# Altium PCB Bedside Lamp V2.0.PcbDoc
Units mm, origin at the board's own origin, x right, y up, seen from the top; angles counter-clockwise.
Board outline 95.4 x 120.8 mm, 2 copper layers (Top Layer, Bottom Layer); 71 components, 52 nets, 282 pads, 79 vias.
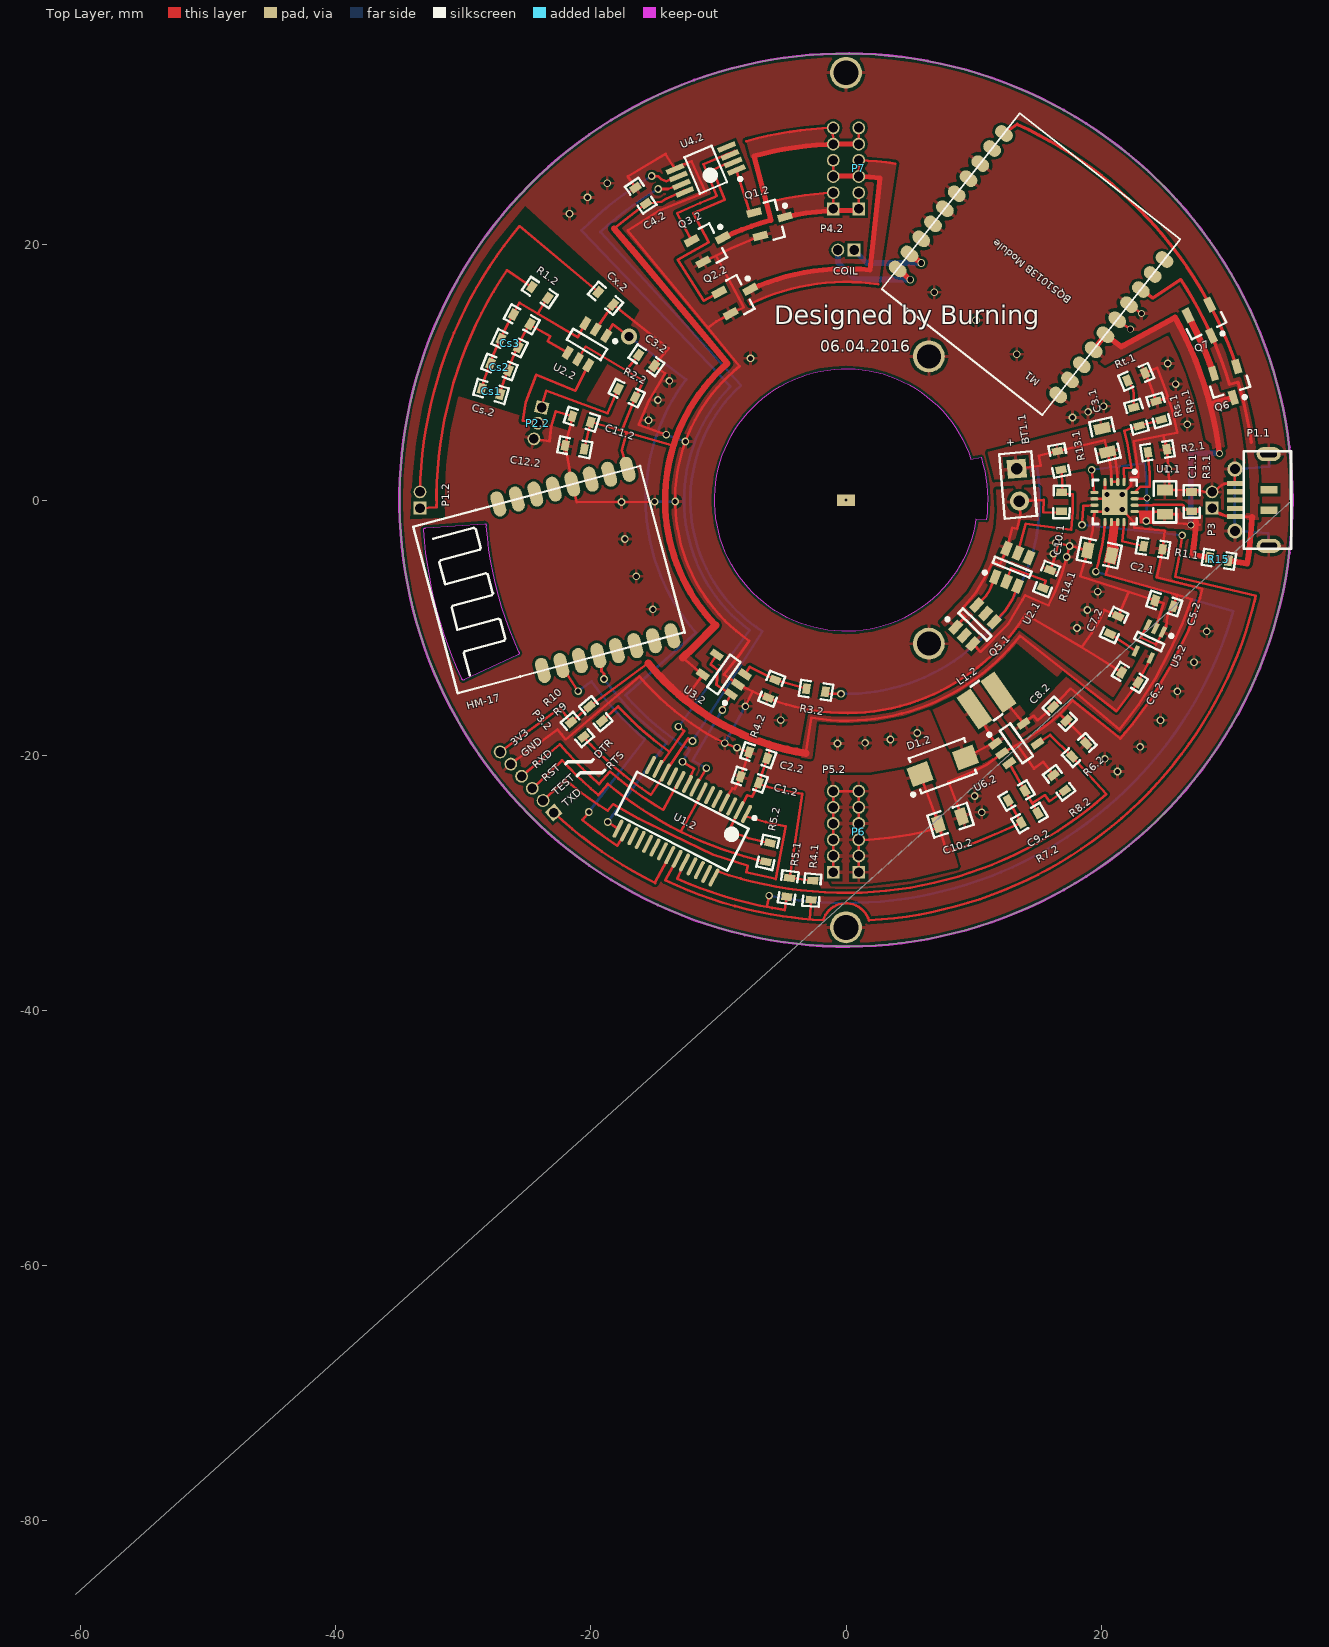
[diagram p0: Top Layer view]
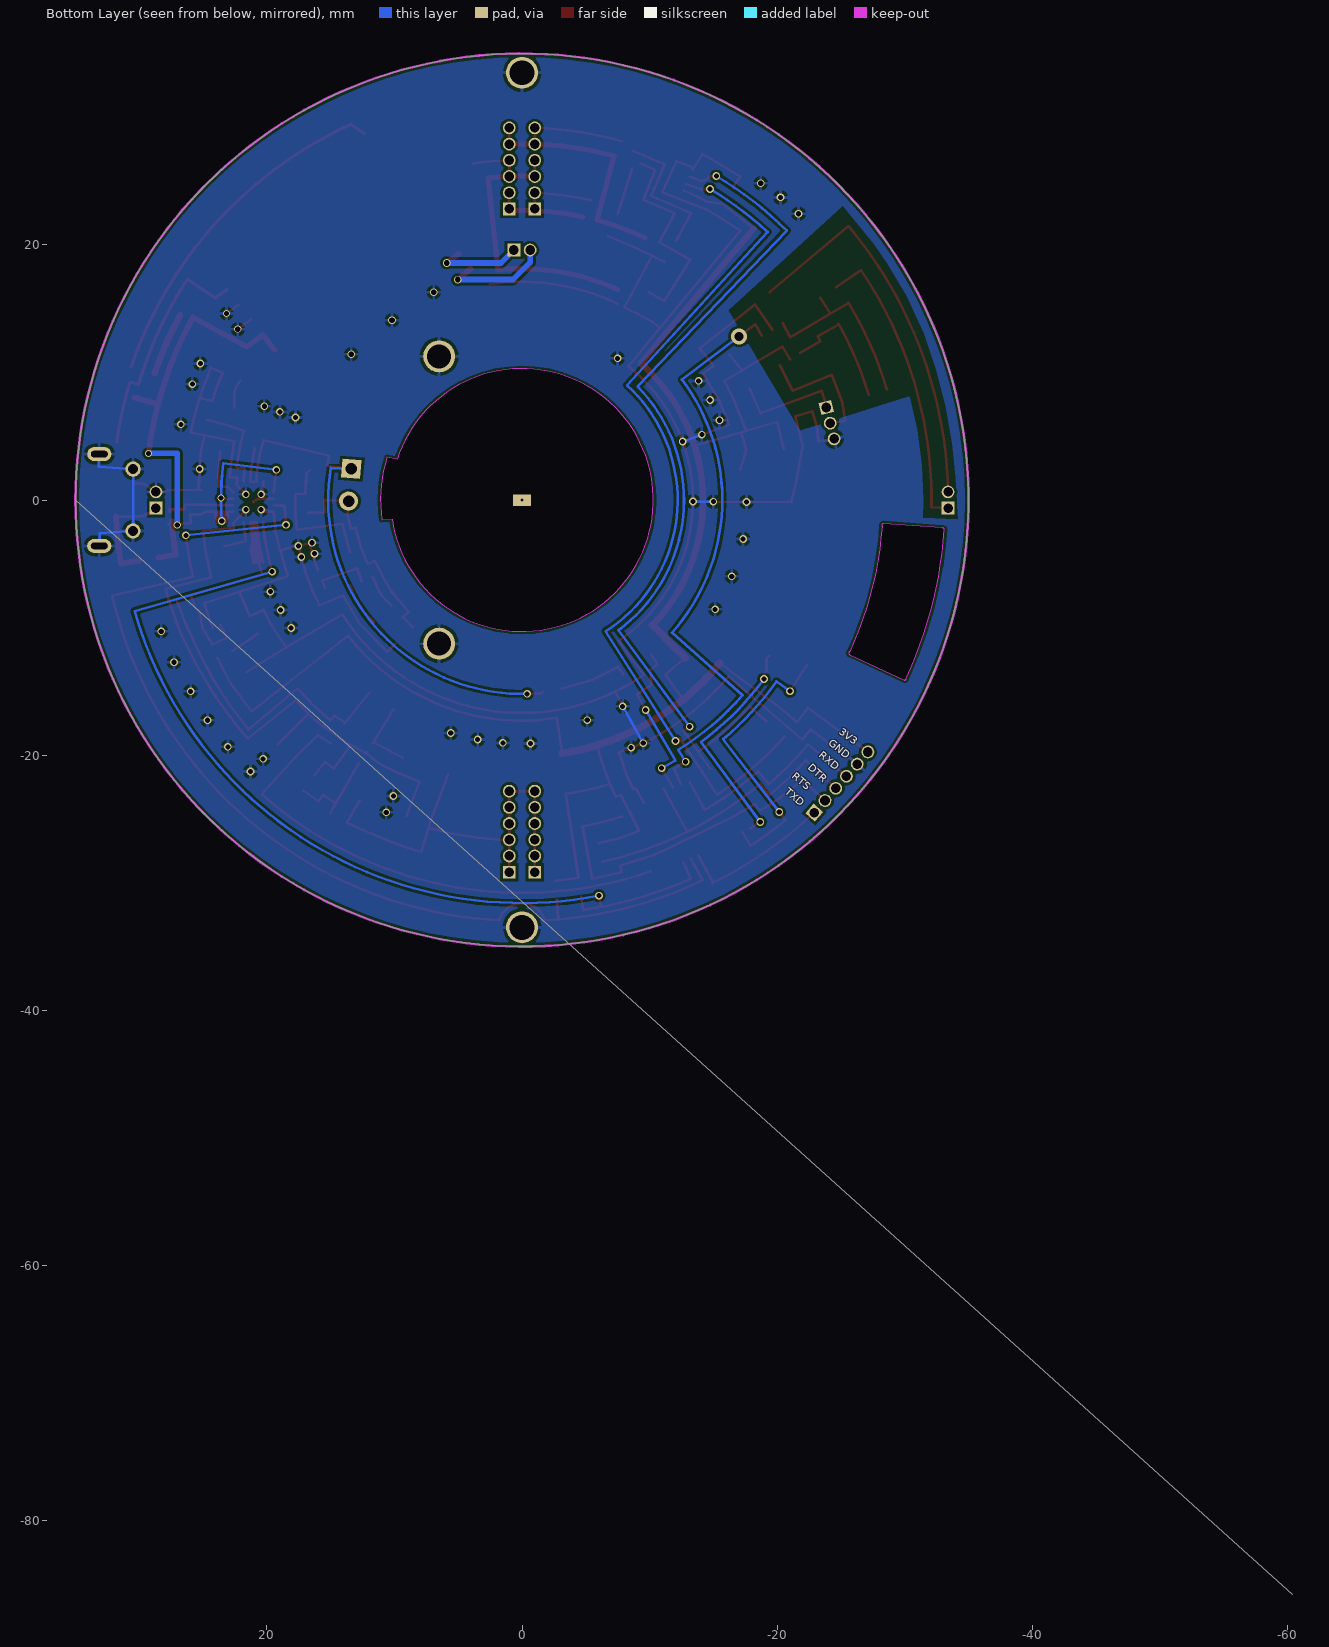
[diagram p1: Bottom Layer view, seen from below]

## Layer stack, top to bottom
Top Solder: solder mask 0.0102, Solder Resist, Dk 3.5
Top Layer: signal copper 0.0356
Dielectric 1: dielectric 0.32, FR-4, Dk 4.8
Bottom Layer: signal copper 0.0356
Bottom Solder: solder mask 0.0102, Solder Resist, Dk 3.5

## Board outline
35,0 ccw(c0,0) 0,35 ccw(c0,0) -35,0 ccw(c0,0) 0,-35 ccw(c0,0) -60.4,-85.8
cut-out: 10.189,-1.511 cw(c0,0) 9.796,3.183 10.586,3.338 cw(c0,0) 10.992,-1.545
cut-out: -30.123,-13.96 cw(c0,0) -33.119,-2.316 cw(c-33.019,-2.309) -33.007,-2.209 cw(c-32.92,-2.302) -32.928,-2.175 -28.34,-1.854 cw(c-28.331,-1.981) -28.203,-1.981 cw(c-28.331,-1.981) -28.225,-2.052 ccw(c0,0) -25.681,-11.889 cw(c-25.739,-12.002) -25.612,-12.002 cw(c-25.739,-12.002) -25.685,-12.118 -29.945,-14.104 cw(c-29.999,-13.989)

## Design rules (kind name [scope] priority, off if disabled: settings)
Clearance [All] p1: gap=0.2
ComponentClearance [All] p1 off: gap=0.254 collisioncheckmode=3 verticalgap=0.254 showdistances=FALSE
PolygonConnect [All] p1: connectstyle=Relief reliefconductorwidth=0.254 reliefentries=4 polygonreliefangle="90 Angle" airgapwidth=0.254
RoutingVias [All] p1: holewidth=0.6 width=1 viastyle="Through Hole" minholewidth=0.711 minwidth=1.27 maxholewidth=0.711 maxwidth=1.27
SolderMaskExpansion [All] p1: expansion=0.102
Width [All] p1: maxlimit=1.5 minlimit=0.2 preferedwidth=0.2
29 further rules are at their usual default settings.

## Classes and differential pairs
component class "U_Control System": C1.2 C2.2 C3.2 C4.2 C5.2 C6.2 C7.2 C8.2 C9.2 C10.2 C11.2 C12.2 Cs1 Cs2 Cs3 Cs.2 Cx.2 D1.2 HM-17 L1.2 P1.2 P2.2 P3.2 P4.2 P5.2 P6 P7 Q1.2 Q2.2 Q3.2 R1.2 R2.2 R3.2 R4.2 R5.2 R6.2 R7.2 R8.2 R9 R10 U1.2 U2.2 U3.2 U4.2 U5.2 U6.2
component class "U_Battery Management": BT1.1 C1.1 C2.1 C3.1 C10.1 COIL D1 M1 P1.1 P3 Q5.1 Q6 Q7 R1.1 R2.1 R3.1 R4.1 R5.1 R13.1 R14.1 R15 Rp.1 Rs.1 Rt.1 U1.1 U2.1

## Components (designator, comment, footprint, x,y, rotation, side; value= is the part's Value field where it differs from the comment)
BT1.1 "Battery" BAT-2 13.488,1.18 r275 top (schematic designator BT1)
C1.1 "0805" D0805 24.999,-0.164 r89.98 top (schematic designator C1)
C1.2 "0603" D0603 -7.551,-21.928 r341 top (schematic designator C1)
C2.1 "0805" D0805 19.879,-4.142 r168 top (schematic designator C2)
C2.2 "0603" D0603 -6.889,-20.007 r341 top (schematic designator C2)
C3.1 "0805" D0805 20.297,4.691 r103 top (schematic designator C3)
C3.2 "0603" D0603 -15.646,10.955 r145 top (schematic designator C3)
C4.2 "0603" D0603 -16.094,23.86 r304 top (schematic designator C4)
C5.2 "0603" D0603 24.956,-8.109 r342 top (schematic designator C5)
C6.2 "0603" D0603 22.253,-13.905 r328 top (schematic designator C6)
C7.2 "0603" D0603 21.019,-9.801 r245 top (schematic designator C7)
C8.2 "0603" D0603 16.758,-16.758 r315 top (schematic designator C8)
C9.2 "0603" D0603 13.374,-23.164 r30 top (schematic designator C9)
C10.1 "0603" D0603 16.899,-0.147 r89.33 top (schematic designator C10)
C10.2 "0603" D0805 8.158,-25.108 r18 top (schematic designator C10)
C11.2 "0603" D0603 -20.721,6.335 r163 top (schematic designator C11)
C12.2 "0603" D0603 -21.27,4.134 r169 top (schematic designator C12)
COIL "Header 2" "HDR1X2 1.27" 0,19.6 r180 top
Cs1 "0603" D0603 -27.828,8.508 r163 top
Cs2 "0603" D0603 -27.167,10.428 r159 top
Cs3 "0603" D0603 -26.374,12.298 r155 top
Cs.2 "0603" D0603 -25.421,14.163 r150.88 top (schematic designator Cs)
Cx.2 "0603" D0603 -18.845,15.813 r140 top (schematic designator Cx)
D1.2 "Diode" DO214AC_SMA 7.585,-20.839 r200 top (schematic designator D1)
HM-17 "HM-17" HM_05_06_07_11_13_17 -20.439,-5.477 r105 top
L1.2 "NR3015T 100M" Inductor.3030 11.013,-15.728 r215 top (schematic designator L1)
M1 "BQ51013B Module" BQ51013B_BT 14.508,18.487 r141.88 top
P1.1 "Micro USB" Micro.Horn 31.828,0 r270.05 top (schematic designator P1)
P1.2 "TouchPad" "HDR1X2 1.27" -33.4,0 r90 top (schematic designator P1)
P2.2 "Mode Select" "HDR1X3 1.27" -24.16,6.024 r256 top (schematic designator P2)
P3 "Connector" "HDR1X2 1.27" 28.7,0 r90 top
P3.2 "MHDR1X6" "HDR1X6 1.27" -25.015,-22.131 r131.5 top (schematic designator P3)
P4.2 "Header 6" "HDR1X6 1.27" -1,26 r90 top (schematic designator P4)
P5.2 "Header 6" "HDR1X6 1.27" -1,-26 r90 top (schematic designator P5)
P6 "Header 6" "HDR1X6 1.27" 1,-26 r90 top
P7 "Header 6" "HDR1X6 1.27" 1,26 r90 top
Q1.2 "AO3400" SOT23_N -5.871,21.911 r15 top (schematic designator Q1)
Q2.2 "AO3400" SOT23_N -8.497,15.981 r28 top (schematic designator Q2)
Q3.2 "AO3400" SOT23_N -10.649,20.029 r28 top (schematic designator Q3)
Q5.1 "FS8205" SOT23-6_N 10.105,-9.759 r46 top (schematic designator Q5)
Q6 "AO3401" SOT23_N 30.048,9.115 r286.88 top
Q7 "AO3401" SOT23_N 28.162,13.888 r296.25 top
R1.1 "0603" D0603 24.085,-3.741 r171 top (schematic designator R1)
R1.2 "0603" D0603 -24.007,16.269 r145.87 top (schematic designator R1)
R2.1 "0603" D0603 24.412,3.866 r188.96 top (schematic designator R2)
R2.2 "0603" D0603 -17.192,8.385 r334 top (schematic designator R2)
R3.1 "0603" D0603 27.1,-0.118 r270.07 top (schematic designator R3)
R3.2 "0603" D0603 -2.362,-14.914 r351 top (schematic designator R3)
R4.1 "0603" D0603 -2.676,-30.583 r85 top (schematic designator R4)
R4.2 "0603" D0603 -5.827,-14.794 r68.5 top (schematic designator R4)
R5.1 "0603" D0603 -4.538,-30.363 r81.5 top (schematic designator R5)
R5.2 "0603" D0603 -6.125,-27.629 r77.5 top (schematic designator R5)
R6.2 "0603" D0603 18.278,-19.6 r43 top (schematic designator R6)
R7.2 "0603" D0603 14.39,-24.924 r30 top (schematic designator R7)
R8.2 "0603" D0603 16.709,-22.173 r307 top (schematic designator R8)
R9 "0603" D0603 -19.618,-16.756 r130.5 top
R10 "0603" D0603 -21.063,-17.99 r130.5 top
R13.1 "0603" D0603 16.715,3.098 r280.46 top (schematic designator R13)
R14.1 "0603" D0603 15.724,-6.194 r248.5 top (schematic designator R14)
R15 "0603" D0603 29.236,-4.63 r351 top
Rp.1 "0603" D0603 24.512,7.029 r286.01 top (schematic designator Rp)
Rs.1 "0603" D0603 22.782,6.533 r286.01 top (schematic designator Rs)
Rt.1 "0603" D0603 22.751,9.657 r23.06 top (schematic designator Rt)
U1.1 "BQ24072/3" QFN16 21.055,-0.156 r270 top (schematic designator U1)
U1.2 "MSP430F21x2" TSSOP28 -12.835,-25.191 r243 top (schematic designator U1)
U2.1 "DW01" SOT23-6_N 13.025,-5.262 r68 top (schematic designator U2)
U2.2 "AT42QT1010" SOT23-6 -20.315,12.206 r239 top (schematic designator U2)
U3.2 "AD8531ART" SOT23-5 -9.579,-13.68 r145 top (schematic designator U3)
U4.2 "PCA9633DP1" TSSOP8 -10.997,25.908 r203 top (schematic designator U4)
U5.2 "RT9193" SC70-5 23.782,-11.09 r245 top (schematic designator U5)
U6.2 "TPS61040" SOT23-5 13.359,-19.079 r35 top (schematic designator U6)

## Footprints (in the part's own frame and the unit in brackets; to place one, negate y for a bottom-side part, rotate by r counter-clockwise, add the part's x,y. Pads: shape width x height; smd on the part's side, far side on the other; paste and mask are expansions set on the pad)
BAT-2 [mm] "Battery; 2 Leads"
  rect 1.5x1.5 hole 0.9: 1(-1.27,0)
  round 1.5 hole 0.9: 2(1.27,0)
  silkscreen extent -2.54,-1.27 2.54,1.27
BQ51013B_BT [mm] "Wireless Receiver Designed by Burning"
  oval 1.5x1 smd: 1(-8,6.75) 2(-8,5.25) 3(-8,3.75) 4(-8,2.25) 5(-8,0.75) 6(-8,-0.75) 7(-8,-2.25) 8(-8,-3.75) 9(-8,-5.25) 10(-8,-6.75) 11(8,-6.75) 12(8,-5.25) 13(8,-3.75) 14(8,-2.25) 15(8,-0.75) 16(8,0.75) 17(8,2.25) 18(8,3.75) 19(8,5.25) 20(8,6.75)
  silkscreen extent -8,-8.75 8,8.75
D0603 [mm] "D0603"
  rect 0.6x0.85 smd: 1(-0.75,0) 2(0.75,0)
  silkscreen extent -1.27,-0.64 1.27,0.64, body extent -0.8,-0.4 0.8,0.4, height 0.5
D0805 [mm] "D0805"
  rect 0.85x1.27 smd: 1(-0.95,0) 2(0.95,0)
  silkscreen extent -1.6,-0.9 1.65,0.9, body extent -1,-0.64 1,0.64, height 1.25
DO214AC_SMA [mm] "Molded Diode, 2-Leads, Body 4.30x2.70mm, IPC Medium Density"
  rect 1.7x1.55 smd: 1(-1.9,0) 2(1.9,0)
  silkscreen extent -2.3,-1.45 3.07,1.45, body extent -2.3,-1.45 2.3,1.45, height 2.5
"HDR1X2 1.27" [mm]
  rect 1x1 hole 0.75 mask+0.05: 1(-0.635,0)
  round 1 hole 0.75 mask+0.05: 2(0.635,0)
"HDR1X3 1.27" [mm] "Header 1 x 3 1.27mm"
  rect 1x1 hole 0.75 mask+0.05: 1(-1.27,0)
  round 1 hole 0.75 mask+0.05: 2(0,0) 3(1.27,0)
"HDR1X6 1.27" [mm]
  rect 1x1 hole 0.75 mask+0.05: 1(-3.175,0)
  round 1 hole 0.75 mask+0.05: 2(-1.905,0) 3(-0.635,0) 4(0.635,0) 5(1.905,0) 6(3.175,0)
HM_05_06_07_11_13_17 [mm]
  oval 2x1 smd: 1(-6.756,5.25) 2(-6.756,3.75) 3(-6.756,2.25) 4(-6.756,0.75) 5(-6.756,-0.75) 6(-6.756,-2.25) 7(-6.756,-3.75) 8(-6.756,-5.25) 9(6.756,-5.25) 10(6.756,-3.75) 11(6.756,-2.25) 12(6.756,-0.75) 13(6.756,0.75) 14(6.756,2.25) 15(6.756,3.75) 16(6.756,5.25)
  silkscreen extent -6.76,-6.25 6.76,12.17
Inductor.3030 [mm] "Molded Inductor, 2-Leads, Body 3.00x3.00mm, IPC Medium Density"
  rect 1.3x3.05 smd: 1(-1.15,0) 2(1.15,0)
  silkscreen extent -0.4,-1.6 0.4,1.6, body extent -1.55,-1.55 1.55,1.55, height 1.5
Micro.Horn [mm]
  oval 1.1x1.9 hole 0.5 slot 1.3 at 90 deg: 0(-3.6,1.313) 0(3.6,1.313)
  round 1.2 hole 0.8: 0(-2.425,-1.337) 0(2.425,-1.337)
  rect 0.6x1.35 smd: 0(-0.8,1.338) 0(0.8,1.338)
  rect 0.4x1.25 smd: 1(1.3,-1.338) 2(0.65,-1.337) 3(0,-1.337) 4(-0.65,-1.337) 5(-1.3,-1.337)
  silkscreen extent -3.81,-0.64 3.81,3.06
QFN16 [mm]
  oval 0.65x0.25 smd: 1(-1.575,0.75) 2(-1.575,0.25) 3(-1.575,-0.25) 4(-1.575,-0.75) 9(1.575,-0.75) 10(1.575,-0.25) 11(1.575,0.25) 12(1.575,0.75)
  oval 0.25x0.65 smd: 5(-0.75,-1.575) 6(-0.25,-1.575) 7(0.25,-1.575) 8(0.75,-1.575) 13(0.75,1.575) 14(0.25,1.575) 15(-0.25,1.575) 16(-0.75,1.575)
  rect 2x2 smd: 17(0,0)
  silkscreen extent -2.5,-1.73 1.73,1.73, body extent -1.58,-1.58 1.58,1.58, height 0.9
SC70-5 [mm] "SC70, 5-Leads, Body 2.03x2.13mm, Pitch 0.65mm, IPC Medium Density"
  rect 0.9x0.35 smd: 1(-1.125,0.65) 2(-1.125,0) 3(-1.125,-0.65) 4(1.125,-0.65) 5(1.125,0.65)
  silkscreen extent -1.25,-1.15 0.3,1.5, body extent -0.67,-1.12 0.67,1.12, height 1.1
SOT23-5 [mm] "SOT23, 5-Leads, Body 2.90x2.80mm, Pitch 0.95mm, IPC Medium Density"
  rect 1x0.55 smd: 1(-1.35,0.95) 2(-1.35,0) 3(-1.35,-0.95) 4(1.35,-0.95) 5(1.35,0.95)
  silkscreen extent -1.47,-1.55 0.5,1.9, body extent -0.87,-1.52 0.87,1.53, height 1.45
SOT23-6 [mm] "SOT23, 6-Leads, Body 2.90x2.80mm, Pitch 0.95mm, IPC Medium Density"
  rect 1x0.55 smd: 1(-1.35,0.95) 2(-1.35,0) 3(-1.35,-0.95) 4(1.35,-0.95) 5(1.35,0) 6(1.35,0.95)
  silkscreen extent -1.47,-1.55 0.5,1.9, body extent -0.88,-1.53 0.88,1.53, height 1.45
SOT23-6_N [mm] "SOT23, 6-Leads, Body 2.9x1.6mm, Pitch 0.95mm, Lead Span 2.7mm, IPC Medium Density"
  rect 1.1x0.65 smd: 1(-1.2,0.95) 2(-1.2,0) 3(-1.2,-0.95) 4(1.2,-0.95) 5(1.2,0) 6(1.2,0.95)
  silkscreen extent -1.32,-1.55 0.25,1.95, body extent -0.9,-1.55 0.9,1.55, height 1.45
SOT23_N [mm] "SOT23, 3-Leads, Body 2.9x1.3mm, Pitch 0.95mm, Lead Span 2.3mm - Reverse Pinning, IPC Medium Density"
  rect 1.15x0.6 smd: 1(-1.125,0.95) 2(1.125,0) 3(-1.125,-0.95)
  silkscreen extent -0.2,-1.5 1.47,1.5, body extent -0.7,-1.5 0.7,1.5, height 1.1
TSSOP8 [mm] "TSOP, 8-Leads, Body 3.00x3.00mm, Pitch 0.65mm, IPC Medium Density"
  rect 1.45x0.42 smd: 1(-2.2,0.975) 2(-2.2,0.325) 3(-2.2,-0.325) 4(-2.2,-0.975) 5(2.2,-0.975) 6(2.2,-0.325) 7(2.2,0.325) 8(2.2,0.975)
  silkscreen extent -2.32,-1.55 1.15,1.86, body extent -1.55,-1.55 1.55,1.55, height 1.1
TSSOP28 [mm] "TSOP, 28-Leads, Body 9.70x4.40mm, Pitch 0.65mm, IPC High Density"
  oval 1.55x0.3 smd: 1(-2.8,4.225) 2(-2.8,3.575) 3(-2.8,2.925) 4(-2.8,2.275) 5(-2.8,1.625) 6(-2.8,0.975) 7(-2.8,0.325) 8(-2.8,-0.325) 9(-2.8,-0.975) 10(-2.8,-1.625) 11(-2.8,-2.275) 12(-2.8,-2.925) 13(-2.8,-3.575) 14(-2.8,-4.225) 15(2.8,-4.225) 16(2.8,-3.575) 17(2.8,-2.925) 18(2.8,-2.275) 19(2.8,-1.625) 20(2.8,-0.975) 21(2.8,-0.325) 22(2.8,0.325) 23(2.8,0.975) 24(2.8,1.625) 25(2.8,2.275) 26(2.8,2.925) 27(2.8,3.575) 28(2.8,4.225)
  silkscreen extent -2.92,-4.9 1.85,5.05, body extent -2.25,-4.9 2.25,4.9, height 1.2

## Part data
BT1.1: "Multicell Battery"
C1.1 C1.2 C2.1 C2.2 C3.1 C3.2 C4.2 C5.2 C6.2 C7.2 C8.2 C9.2 C10.1 C10.2 C11.2 C12.2 Cs1 Cs2 Cs3 Cs.2 Cx.2: library part Cap, "Capacitor"
COIL: "Header, 2-Pin"
D1.2: "Default Diode"
L1.2: library part Inductor, "Inductor"
M1: library part BQ51013B-BT
P1.1: library part "Micro USB Horn", "MIcro USB Connector Horn"
P2.2: library part "Header 3", "Header, 3-Pin"
P3: library part "Header 2", "Header, 2-Pin"
P3.2 P4.2 P5.2 P6 P7: "Header, 6-Pin"
Q1.2 Q2.2 Q3.2: library part NMOS-2, "N-Channel Power MOSFET"
Q5.1: "FS8205 Dual MOS"
Q6 Q7: "AO3401 P-Channel MOSFET"
R1.1 R1.2 R2.1 R2.2 R3.1 R3.2 R4.1 R4.2 R5.1 R5.2 R6.2 R7.2 R8.2 R9 R10 R13.1 R14.1 R15 Rp.1 Rs.1 Rt.1: library part Res1, "Resistor"
U1.1: library part BQ24073, "Standalone Battery Management Chip"
U1.2: library part MSP430F21x2_PW, "MSP430F21x2_PW"
U2.1: "Battery Protector"
U2.2: "AT42QT1010 SOT23-6"
U3.2: "Low Cost, 250 mA Output Single-Supply Amplifier"
U5.2: "3V3 Voltage Regulator"

## Free pads (board coordinates)
  round 2.5 hole 1.95: 0(0,-33.5) 0(0,33.5)
  round 2.5 hole 1.9 mask+0.05: 0(6.5,-11.258) 0(6.5,11.258)
  rect 1.4x0.9 hole 0.254 mask+0.05: 3(0,0)

## Via types
v1: diameter 0.6, hole 0.4, Top Layer to Bottom Layer, 64 vias
v2: diameter 0.55, hole 0.4, Top Layer to Bottom Layer, 5 vias
v3: diameter 0.6, hole 0.45, Top Layer to Bottom Layer, 5 vias
v4: diameter 0.6, hole 0.4, Top Layer to Bottom Layer, tented top, 4 vias
v5: diameter 1.27, hole 0.711, Top Layer to Bottom Layer, 1 vias

## Nets (pads, with @x,y where several pads share a name; then routed paths per layer and width w, separated by ;. In a path a pad name is that pad's centre, name@x,y a point inside that pad or via, vN(x,y) a via of type N, cw(c..) or ccw(c..) an arc to the next point about the centre after c; other vN are vias at no path point)
3V3: C1.2.2 C2.2.2 C3.2.2 C4.2.2 C6.2.2 C11.2.1 C12.2.1 HM-17.9 P3.2.6 R2.2.2 R4.1.2 R5.1.2 R5.2.2 R9.2 R10.2 U1.2.2 U2.2.5 U3.2.5 U4.2.8 U5.2.5 | length 163.9
  Top Layer w0.2: P3.2.6 -22.409,-16.283 ; -22.417,-16.289 ccw(c0,0) R10.2 R9.2 -15.51,-12.785 ; U2.2.5 -20.421,12.029 -17.233,10.151 ; C12.2.1 C11.2.1 -17.582,5.424 ; -18.185,21.291 C4.2.2 -14.478,23.368 -14.164,23.572 -12.695,24.265 U4.2.8@-12.691,24.267 ; HM-17.9 -17.573,3.896 -17.198,5.314 ; C3.2.2 -17.233,10.151 ; -13.527,4.265 -17.198,5.314 ; -12.804,-12.365 U3.2.5 -12.394,-15.313 -12.647,-15.622 ; C1.2.2@-6.87,-22.264 ccw(c0,0) -3.444,-23.044 R5.1.2 R4.1.2 ; R5.2.2 -7.608,-26.531 -9.18,-25.923 U1.2.2 -7.742,-23.139 -7.337,-23.271 C1.2.2 C2.2.2 -5.876,-19.222 ; -3.144,-19.853 -2.706,-17.087 -1.207,-17.258 ccw(c0,0) 13.633,-10.651 ; 13.711,-10.713 18.045,-14.099 21.197,-16.561 C6.2.2 U5.2.5 ; -17.582,5.424 -17.198,5.314 ; -17.582,5.424 R2.2.2 -15.854,9.339 -17.233,10.151
  Top Layer w0.5: -18.185,21.291 -16.626,19.466 -9.305,10.704 ccw(c0,0) -13.527,4.265 ccw(c0,0) -10.232,-9.822
  Top Layer w0.6: -15.51,-12.785 ccw(c0,0) -12.647,-15.622 ccw(c0,0) -3.144,-19.853 ; -12.804,-12.365 -11.941,-11.531 -10.232,-9.822
5V: C1.1.1 M1.4 M1.5 Q6.2 R15.1 U1.1.5 U1.1.13 U1.1.15 | length 52.7
  Top Layer w0.2: v1(19.255,2.364) U1.1.5 ; U1.1.13 23.583,-0.906 ; U1.1.15 23.539,0.094 v2(23.599,0.154) ; v1(23.542,-1.646) 23.583,-0.906 ; 27.732,-1.939 27.433,-1.918 25.962,-1.815 26.002,-1.106 25.119,-1.106 ccw(c24.636,-1.589) 24.636,-0.906 23.583,-0.906
  Top Layer w0.45: M1.4 M1.5 21.577,12.022 21.752,12.119 25.801,14.302 ; 26.017,13.906 ccw(c0,0) 25.801,14.302 ; 27.232,-3.827 cw(c0,0) 27.161,-4.302 ; 27.395,-2.397 ccw(c0,0) 27.433,-1.918 ccw(c0,0) 27.449,-1.679 cw(c0,0) 27.161,-4.302 ; R15.1 27.161,-4.302 ; 28.531,7.501 Q6.2 ; v2(29.272,3.659) ccw(c0,0) 25.801,14.302
  Bottom Layer w0.2: v1(19.255,2.364) 23.424,2.876 cw(c0,0) v1(23.542,-1.646)
  Bottom Layer w0.45: v2(27.03,-1.949) 27.03,3.659 v2(29.272,3.659)
ADC: U1.2.8 U3.2.1 U3.2.4 | length 13.2
  Top Layer w0.2: U1.2.8 v1(-10.943,-21.022) ; U3.2.4 -10.618,-12.879 -10.049,-13.327 -10.152,-14.499 U3.2.1 v1(-9.694,-16.457)
  Bottom Layer w0.2: v1(-10.943,-21.022) -12.029,-20.421 v1(-9.694,-16.457)
ADEN: M1.11 Q6.1 Q7.1 | length 27.6
  Top Layer w0.254: M1.11 13.423,29.455 cw(c0,0) Q6.1
B-: P4.2.5 P4.2.6 P7.5 P7.6 Q3.2.2 | length 27
  Top Layer w0.2: -7.801,28.13 cw(c0,0) P4.2.6 ; P4.2.6@-1.038,29.174 P4.2.5 ; P7.5 P7.6
  Top Layer w0.4: Q3.2.2 cw(c0,0) -5.878,21.938 -7.227,26.971 cw(c0,0) P7.5
G-: P4.2.3 P4.2.4 P7.3 P7.4 Q2.2.2 | length 36.6
  Top Layer w0.2: -7.496,15.369 cw(c0,0) 2.528,16.912 ; P4.2.3 P4.2.4 ; P7.3 1,25.38 P7.4 cw(c0,0) 3.85,26.374 ccw(c0,0) 3.479,26.426
  Top Layer w0.4: Q2.2.2 cw(c0,0) 1.896,18.036 2.655,25.261 ccw(c0,0) 1,25.38 ccw(c0,0) P4.2.3@-1,25.38
GND: C1.1.2 C1.2.1 C2.1.2 C2.2.1 C3.1.2 C3.2.1 C4.2.1 C5.2.1 C6.2.1 C7.2.1 C8.2.2 C10.2.2 C11.2.2 C12.2.2 Cx.2.1 HM-17.12 M1.1 M1.2 M1.6 M1.7 M1.13 M1.14 M1.15 M1.16 M1.17 M1.18 P1.1.0@30.488,2.424 P1.1.0@30.493,-2.426 P1.1.0@33.137,3.601 P1.1.0@33.144,-3.599 P1.1.5 P2.2.3 P3.2 P3.2.5 pad.0 Q1.2.3 Q2.2.3 Q3.2.3 Q5.1.3 R1.1.1 R2.1.1 R3.1.1 R4.2.1 R6.2.2 R8.2.1 R14.1.1 Rp.1.1 Rt.1.2 U1.1.4 U1.1.6 U1.1.8 U1.1.17 U1.2.4 U2.2.2 U3.2.2 U4.2.5 U5.2.2 U6.2.2 | length 318.4
  Top Layer w0.2: P3.2.5 -22.617,-17.991 ccw(c0,0) -21.976,-18.769 -16.197,-13.833 ccw(c0,0) v1(-9.504,-19.062) C2.2.1 C1.2.1 -8.708,-22.686 -8.906,-22.609 U1.2.4 ; P2.2.3 -23.245,4.624 -23.093,5.758 -22.76,6.958 C11.2.2 C12.2.2 HM-17.12 -21.099,-0.184 v1(-14.999,-0.131) ; U2.2.2 Cx.2.1 -13.915,11.885 -14.019,11.763 -14.222,11.517 C3.2.1 -14.171,9.923 -15.414,7.854 -16.257,5.917 v1(-14.095,5.13) ; C4.2.1 -17.111,25.369 -14.129,27.142 ; -14.16,27.123 U4.2.5 ; U4.2.5@-13.453,26.062 -13.448,26.064 -12.109,26.571 -10.989,24.114 -14.507,22.772 -17.117,21.138 -10.822,13.498 -8.341,10.487 ccw(c0,0) v1(-12.591,4.583) ccw(c0,0) -7.59,-11.043 -8.326,-12.115 -9.579,-13.68 ccw(c0,0) -7.321,-15.01 ; Q3.2.3 -10.193,19.157 ; -10.817,13.502 -10.169,13.996 Q2.2.3 -8.028,15.098 -10.193,19.157 ; v1(-7.891,-16.178) -7.321,-15.01 ; Q1.2.3 -7.599,20.326 -8.999,19.746 -10.193,19.157 ; C10.2.2 8.037,-22.083 9.932,-21.298 11.033,-20.749 U6.2.2 13.429,-19.178 ; Q5.1.3 10.536,-11.908 12.694,-9.74 13.839,-7.83 14.039,-7.465 15.877,-8.265 16.415,-7.138 16.925,-5.828 v1(17.534,-3.602) ; U6.2.2@12.19,-19.778 12.197,-19.772 U6.2.2@12.203,-19.768 ; 14.087,-8.97 cw(c0,0) 14.085,-8.973 ; R14.1.1 16.382,-4.543 16.659,-3.389 v1(17.534,-3.602) ; R8.2.1 15.467,-20.525 14.741,-21.052 13.429,-19.178 ; R6.2.2@19.163,-19.163 C8.2.2 16.758,-16.758 ; U1.1.6 20.451,0.094 cw(c20.451,-0.76) U1.1.17 ; U1.1.4 20.305,0.806 ccw(c20.817,0.806) v4(20.455,0.444) ; v4(20.455,-0.756) cw(c20.093,-0.394) 20.093,-0.906 U1.1.8 19.355,-2.376 C2.1.2 ; M1.6 v2(22.286,13.391) ; C6.2.1 18.827,-11.764 18.487,-11.552 ; v4(21.655,-0.756) 22.63,-1.781 22.595,-2.176 22.994,-2.214 23.768,-2.281 24.984,-2.406 24.913,-3.059 R1.1.1 24.551,-5.219 24.354,-6.072 27.944,-6.967 27.819,-7.454 27.753,-7.696 26.838,-10.285 25.483,-12.984 23.977,-15.522 22.471,-17.559 21.509,-18.698 17.75,-15.704 16.758,-16.758 ; v4(21.655,0.444) 22.369,1.172 22.331,1.757 22.929,1.805 22.852,2.604 22.803,3.002 22.554,4.601 24.89,5.064 ; M1.7 v2(23.173,14.621) ; Rt.1.2 24.398,10.356 ; Rt.1.2@23.473,9.964 cw(c0,0) Rp.1.1@24.301,7.726 ; U5.2.2 24.918,-8.096 C5.2.1 22.16,-7.2 ; Rp.1.1@24.292,7.76 25.263,8.019 ; 24.398,10.356 cw(c0,0) 25.973,5.284 ; C1.1.2@25.112,0.797 27.654,0.765 28.236,0.594 ccw(c28.236,2.056) 29.27,1.022 cw(c29.938,0.354) 29.516,1.199 cw(c29.938,0.354) 29.938,1.299 P1.1.5 P1.1.0@30.488,2.424 ; C1.1.2@25.366,0.808 25.261,2.655 R2.1.1 24.89,5.064 ; 25.968,5.283 24.89,5.064 ; -7.321,-15.01 ccw(c0,0) -2.612,-16.494 ccw(c0,0) 14.085,-8.973 ; 13.429,-19.178 14.143,-18.768 15.483,-17.811 16.153,-17.323 16.758,-16.758 ; 14.085,-8.973 18.487,-11.552 ; v1(17.534,-3.602) C2.1.2 ; 18.487,-11.552 19.246,-10.45 19.857,-9.471 20.175,-8.772 20.251,-8.596 C7.2.1 22.16,-7.2 ; C2.1.2 18.355,-5.964 22.16,-7.2
  Bottom Layer w0.2: v1(-14.999,-0.131) v1(-13.399,-0.117) ; v1(-14.095,5.13) v1(-12.591,4.583) ; v1(-9.504,-19.062) v1(-7.891,-16.178) ; P1.1.0@33.137,3.601 33.197,2.613 30.488,2.424 30.493,-2.426 33.098,-2.605 P1.1.0@33.144,-3.599
  other v1: 10.647,-24.485 10.088,-23.202 21.284,-21.284 20.294,-20.294 -8.551,-19.413 23.058,-19.348 -0.667,-19.088 1.499,-19.041 3.481,-18.78 5.584,-18.265 -5.112,-17.259 24.656,-17.265 25.981,-15 27.28,-12.721 28.285,-10.295 18.105,-10.036 18.927,-8.626 -15.144,-8.568 19.734,-7.182 -16.445,-5.985 17.295,-4.473 16.265,-4.206 16.463,-3.349 -17.333,-3.056 -17.599,-0.154 25.273,2.434 26.75,5.93 -15.484,6.256 17.76,6.464 18.982,6.909 20.203,7.353 -14.745,7.84 25.848,9.09 -13.845,9.339 25.222,10.706 -7.493,11.109 -21.673,22.443 -20.263,23.725 -18.716,24.838
  other v3: 13.383,11.43 10.197,14.099 6.916,16.293
LEDB: Q3.2.1 U4.2.3 | length 11.2
  Top Layer w0.2: Q3.2.1 -13.247,22.488 -11.441,23.285 -10.328,23.752 -10.12,23.841 -11.175,26.326 -9.15,27.187 U4.2.3@-8.739,27.362
LEDEN: R6.2.1 U1.2.28 U6.2.4 | length 40.2
  Top Layer w0.2: U1.2.28@-10.083,-29.103 ccw(c0,0) 20.409,-23.068 R6.2.1 16.008,-18.415 U6.2.4
LEDG: Q2.2.1 U4.2.2 | length 17
  Top Layer w0.2: Q2.2.1 -11.149,15.631 -13.192,18.84 -10.751,20.219 -11.972,22.495 -9.515,23.55 -10.444,25.869 U4.2.2@-9.304,26.407
LEDR: Q1.2.1 U4.2.1 | length 3.7
  Top Layer w0.2: U4.2.1@-8.641,25.987 Q1.2.1@-7.503,22.441
MODE: P2.2.2 U2.2.6 | length 10.5
  Top Layer w0.2: P2.2.2 -25.352,6.204 -25.093,7.672 -24.292,9.815 -21.232,8.578 U2.2.6
NetBT1.1_2: BT1.1.2 C10.1.1 Q5.1.1 U2.1.6 | length 16.8
  Top Layer w0.2: Q5.1.1 9.344,-9.182 8.916,-8.761 10.176,-7.259 10.887,-6.109 11.548,-4.784 12.103,-5.013 U2.1.6 13.019,-2.179 13.413,-2.245 13.648,-1.194 BT1.1.2 15.5,0 15.471,-0.946 C10.1.1@16.747,-0.994
NetC7.2_2: C7.2.2 U5.2.4 | length 2.4
  Top Layer w0.2: C7.2.2 U5.2.4
NetC9.2_2: C9.2.2 R7.2.2 R8.2.2 U6.2.3 | length 7.8
  Top Layer w0.2: U6.2.3 C9.2.2 14.594,-23.778 ; R7.2.2 14.594,-23.778 ; R8.2.2 15.937,-23.628 15.601,-23.13 14.594,-23.778
NetC10.1_2: C10.1.2 R13.1.2 U2.1.5 | length 11.5
  Top Layer w0.2: U2.1.5 14.079,-1.853 17.648,-2.323 17.776,-0.932 17.794,0.466 17.003,0.497 16.898,2.11 R13.1.2@16.655,2.324
NetCOIL_1: COIL.1 M1.19 | length 6.9
  Top Layer w0.45: M1.19 v3(5.904,18.585)
  Bottom Layer w0.45: COIL.1 1.65,18.585 v3(5.904,18.585)
NetCOIL_2: COIL.2 M1.20 | length 8.5
  Top Layer w0.45: M1.20 v3(5.037,17.281)
  Bottom Layer w0.45: COIL.2 -0.635,18.616 0.701,17.281 v3(5.037,17.281)
NetCs1_1: Cs1.1 Cs2.1 Cs3.1 Cs.2.1 U2.2.4 | length 10.2
  Top Layer w0.2: Cs1.1@-27.177,8.244 cw(c0,0) Cs.2.1@-24.809,13.823 ; Cs.2.1@-24.839,13.769 -23.177,12.847 -23.398,12.441 U2.2.4
NetCs1_2: Cs1.2 Cs2.2 Cs3.2 Cs.2.2 R1.2.1 U2.2.3 | length 16
  Top Layer w0.2: Cs1.2@-28.612,8.68 cw(c0,0) -25.596,15.455 ; -25.861,15.006 cw(c0,0) -25.596,15.455 ; -24.175,14.616 cw(c0,0) R1.2.1 ; U2.2.3 -21.031,12.762 -25.596,15.455
NetCx.2_2: Cx.2.2 P1.2.2 | length 30.7
  Top Layer w0.2: P1.2.2 cw(c0,0) -25.59,21.473 ; -25.586,21.469 Cx.2.2
NetD1.2_1: D1.2.1 L1.2.2 U6.2.1 | length 5.7
  Top Layer w0.2: D1.2.1 U6.2.1@11.652,-18.994 ; L1.2.2 U6.2.1
NetP1.2_1: P1.2.1 R1.2.2 | length 23.5
  Top Layer w0.2: P1.2.1 -32.101,-0.56 ; -32.104,-0.355 ccw(c0,0) -32.101,-0.56 ; -26.578,18.012 ccw(c0,0) -32.101,-0.56 ; -26.573,18.008 R1.2.2
NetP2.2_1: P2.2.1 R2.2.1 | length 8.5
  Top Layer w0.2: P2.2.1@-23.879,7.301 -23.492,8.55 -18.7,6.806 R2.2.1
NetQ5.1_4: Q5.1.4 U2.1.3 | length 3.4
  Top Layer w0.2: Q5.1.4 12.527,-8.609 13.029,-7.829 U2.1.3
NetQ5.1_6: Q5.1.6 U2.1.1 | length 2.7
  Top Layer w0.2: Q5.1.6 10.961,-7.533 11.279,-7.048 U2.1.1
NetQ6_3: Q6.3 Q7.3 | length 5
  Top Layer w0.5: Q7.3 cw(c0,0) Q6.3
NetR1.1_2: R1.1.2 U1.1.12 | length 3.2
  Top Layer w0.2: U1.1.12 21.713,-2.859 21.659,-3.237 R1.1.2
NetR2.1_2: R2.1.2 U1.1.16 | length 4.1
  Top Layer w0.2: U1.1.16 23.079,1.043 23.797,1.043 23.809,2.083 R2.1.2
NetR3.1_2: R3.1.2 U1.1.14 | length 5.6
  Top Layer w0.2: U1.1.14 22.63,-0.421 24.045,-0.421 24.084,-0.381 26.3,-0.381 cw(c26.3,-0.659) 26.496,-0.462 26.496,-0.742 27.659,-0.742 27.659,-0.906 27.555,-0.906
NetR3.2_1: R3.2.1 R4.2.2 U3.2.3 | length 5.5
  Top Layer w0.2: U3.2.3 -7.55,-13.077 -7.436,-13.142 R4.2.2 R3.2.1
NetR4.1_1: R4.1.1 U1.1.7 U1.2.23 | length 84.8
  Top Layer w0.2: U1.2.23 -14.165,-29.808 ccw(c0,0) -3.984,-32.761 ; -4.261,-32.727 ccw(c0,0) -1.799,-32.954 cw(c0,-33.5) 1.803,-32.967 ; -2.838,-32.878 R4.1.1 ; 1.802,-32.951 ccw(c0,0) 32.138,-7.494 ; v1(18.498,-1.944) ccw(c0,0) 18.594,-0.487 ; 18.592,-0.468 U1.1.7 ; 25.909,-5.566 cw(c0,0) 25.808,-6.018 ; v1(26.355,-2.77) cw(c0,0) 25.808,-6.018 ; 32.029,-7.946 ccw(c0,0) 32.138,-7.494 ; 25.808,-6.018 32.138,-7.494
  Bottom Layer w0.2: v1(18.498,-1.944) v1(26.355,-2.77)
NetR5.1_1: R5.1.1 U1.1.9 U1.2.24 | length 74.7
  Top Layer w0.2: U1.2.24 -13.22,-29.69 ccw(c0,0) -4.804,-32.143 R5.1.1 ; -6.202,-31.903 v1(-6.03,-31.019) ; v1(19.589,-5.617) ccw(c0,0) U1.1.9
  Bottom Layer w0.2: v1(-6.03,-31.019) ccw(c0,0) 30.376,-8.71 ; v1(19.589,-5.617) 30.376,-8.71 ; 30.219,-9.239 ccw(c0,0) 30.376,-8.71
NetR14.1_2: R14.1.2 U2.1.2 | length 4.6
  Top Layer w0.2: U2.1.2 12.934,-5.358 15.669,-6.331 R14.1.2
NetRp.1_2: Rp.1.2 Rs.1.2 U1.1.1 | length 7.6
  Top Layer w0.2: U1.1.1 21.759,2.479 22.355,2.547 22.253,3.326 22.048,4.486 21.832,5.443 Rs.1.2 Rp.1.2
NetRs.1_1: Rs.1.1 Rt.1.1 | length 2.2
  Top Layer w0.2: Rt.1.1 cw(c20.82,8.123) 22.575,8.123 Rs.1.1
P1.1: P3.2.1 U1.2.22 | length 12.2
  Top Layer w0.2: P3.2.1 ccw(c0,0) -14.96,-30.031 ; -14.984,-30.018 U1.2.22
P2.2: P3.2.4 U1.2.10 | length 17.2
  Top Layer w0.2: P3.2.4 -22.438,-19.152 ; -22.432,-19.159 ccw(c0,0) -19.354,-22.264 -18.501,-21.283 ccw(c0,0) -14.319,-24.294 ; -14.316,-24.296 U1.2.10@-13.164,-22.148
P26: U1.2.6
P27: U1.2.5
"POW IN": M1.8 P1.1.1 P3.1 Q7.2 R15.2 | length 27.7
  Top Layer w0.254: M1.8 24.051,15.843 26.239,17.285 ; 26.292,17.204 ccw(c0,0) 26.239,17.285 ; Q7.2@28.641,12.871 cw(c0,0) 30.068,9.049 ; Q7.2 ccw(c0,0) 26.239,17.285 ; P3.1 ccw(c30.308,0.973) 30.308,-1.301 P1.1.1 31.822,-1.324 31.972,-1.326 ; 29.905,9.573 cw(c0,0) 30.068,9.049 ; 30.758,9.184 ccw(c0,0) 30.738,9.251 ; 31.778,4.537 ccw(c0,0) 30.738,9.251 ; 30.068,9.049 30.738,9.251
  Top Layer w0.45: R15.2 31.408,-4.975 ; 31.458,-4.982 ccw(c0,0) 31.823,-1.32
R-: P4.2.1 P4.2.2 P7.1 P7.2 Q1.2.2 | length 12.8
  Top Layer w0.2: -5.425,23.498 cw(c0,0) P4.2.2 P4.2.1 ; P7.1 P7.2
  Top Layer w0.4: Q1.2.2 cw(c0,0) P7.1@0.994,22.69
RST: P3.2.3 R5.2.1 U1.2.7 | length 26
  Top Layer w0.2: P3.2.3 -22.263,-20.406 ; -22.266,-20.403 ccw(c0,0) -19.412,-23.135 -18.705,-22.292 ; -18.673,-22.254 ccw(c0,0) -12.962,-25.998 ; -12.55,-25.252 -11.238,-22.863 U1.2.7@-11.123,-22.654 ; -12.547,-25.254 -12.8,-25.687 -12.961,-25.998 ; R5.2.1 cw(c0,0) -12.962,-25.998
SCL: R9.1 U1.2.13 U4.2.6 | length 68.9
  Top Layer w0.2: R9.1 -17.863,-16.178 ccw(c0,0) -13.821,-19.743 ; v1(-15.24,25.4) -14.732,25.4 -14.478,25.146 -14.102,24.98 U4.2.6 U4.2.6@-13.407,25.243 ; U1.2.13 -12.848,-18.349 -12.676,-18.103 v1(-13.146,-17.765)
  Bottom Layer w0.2: v1(-15.24,25.4) ccw(c0,0) -20.756,21.133 -9.058,8.902 ccw(c0,0) -7.554,-10.209 v1(-13.146,-17.765)
SDA: R10.1 U1.2.12 U4.2.7 | length 69.1
  Top Layer w0.2: R10.1 ccw(c0,0) -15.294,-23.107 U1.2.12 -12.362,-18.677 v1(-12.036,-18.892) ; v1(-14.732,24.384) -13.97,24.384 U4.2.7
  Bottom Layer w0.2: v1@-14.738,24.394 ccw(c0,0) -19.254,21.012 -8.242,8.995 ccw(c0,0) -6.555,-10.289 v1(-12.036,-18.892)
TEST: P3.2.2 U1.2.1 | length 29.1
  Top Layer w0.2: P3.2.2 -21.986,-21.943 ccw(c-6.088,-3.68) -18.689,-24.356 -18.263,-23.844 -16.23,-24.992 -13.668,-26.255 -10.401,-27.819 -7.687,-28.688 -7.823,-29.198 -5.507,-29.711 -4.741,-25.58 cw(c0,0) U1.2.1@-7.823,-24.812
TOUCH: U1.2.9 U2.2.1 | length 47.2
  Top Layer w0.2: U2.2.1 -18.289,13.782 v5(-17.011,12.819) ; v1(-12.824,-20.523) -11.917,-21.063 U1.2.9
  Bottom Layer w0.2: v5(-17.011,12.819) -12.539,9.448 ccw(c0,0) -11.759,-10.403 -17.299,-15.305 ccw(c0,0) -12.248,-19.583 v1(-12.824,-20.523)
UCA0RXD: HM-17.2 U1.2.16 | length 22.6
  Top Layer w0.2: HM-17.2 v1(-21.004,-14.982) ; v1@-20.1,-24.383 v1(-20.164,-24.46) -20.673,-25.078 -20.232,-25.435 ccw(c0,0) -17.94,-27.1 U1.2.16
  Bottom Layer w0.2: v1(-21.004,-14.982) -19.947,-14.228 ccw(c0,0) -15.765,-18.755 v1(-20.164,-24.46)
UCA0TXD: HM-17.4 U1.2.15 | length 17.8
  Top Layer w0.2: HM-17.4 -19.168,-12.444 -19.168,-13.422 -18.971,-13.619 v1(-18.971,-14.038) ; v1(-18.677,-25.241) U1.2.15
  Bottom Layer w0.2: v1(-18.971,-14.038) ccw(c0,0) -14.038,-18.971 v1(-18.677,-25.241)
VBAT: BT1.1.1 C3.1.1 R3.2.2 R13.1.1 U1.1.2 U1.1.3 | length 44.2
  Top Layer w0.2: R3.2.2 -1.458,-15.195 v1(-0.398,-15.195) ; BT1.1.1 15.265,2.692 15.103,3.487 16.383,3.799 20.267,4.679 C3.1.1 20.697,2.909 20.785,2.185 U1.1.3 U1.1.2 ccw(c0,0) C3.1.1@20.96,4.074
  Bottom Layer w0.2: v1(-0.398,-15.195) ccw(c0,0) 14.992,2.509 BT1.1.1
VLED: C9.2.1 C10.2.1 D1.2.2 P5.2.1 P5.2.2 P5.2.3 P5.2.4 P5.2.5 P5.2.6 P6.1 P6.2 P6.3 P6.4 P6.5 P6.6 R7.2.1 | length 35.9
  Top Layer w0.2: P5.2.1 P5.2.2 P5.2.3 P5.2.4 P5.2.5 P5.2.6 P6.6 P6.5 P6.4 P6.3 P6.2 P6.1 ; P6.3@1.002,-26.681 ccw(c0,0) C10.2.1@7.324,-25.676 ; D1.2.2 7.223,-25.34 7.243,-25.405 7.911,-27.588 8.391,-27.446 9.344,-27.136 10.285,-26.794 11.673,-26.219 R7.2.1 C9.2.1
VOUT: C2.1.1 C5.2.2 C8.2.1 L1.2.1 U1.1.10 U1.1.11 U5.2.1 U5.2.3 U6.2.5 | length 46.3
  Top Layer w0.2: L1.2.1 U6.2.5 ; U6.2.5@13.863,-17.445 13.866,-17.443 14.696,-16.905 15.024,-17.283 C8.2.1 17.619,-14.784 21.449,-17.998 22.936,-16.06 24.249,-14 25.377,-11.833 26.405,-9.611 27.108,-7.773 25.954,-7.442 ; C2.1.1@20.3,-4.874 ccw(c0,0) U1.1.10 U1.1.11 cw(c0,0) C2.1.1@20.982,-4.079 ; C2.1.1 20.805,-4.351 20.379,-5.844 25.954,-7.442 ; U5.2.3 23.111,-10.777 24.289,-11.326 U5.2.1@24.851,-10.35 ; U5.2.1 ccw(c24.149,-9.647) 25.135,-9.647 25.135,-9.63 cw(c26.958,-9.63) C5.2.2 25.954,-7.442
pads on no net: HM-17.1 HM-17.3 HM-17.5 HM-17.6 HM-17.7 HM-17.8 HM-17.10 HM-17.11 HM-17.13 HM-17.14 HM-17.15 HM-17.16 M1.3 M1.9 M1.10 M1.12 P1.1.0@33.165,0.801 P1.1.0@33.166,-0.799 P1.1.2 P1.1.3 P1.1.4 Q5.1.2 Q5.1.5 U1.2.3 U1.2.11 U1.2.14 U1.2.17 U1.2.18 U1.2.19 U1.2.20 U1.2.21 U1.2.25 U1.2.26 U1.2.27 U2.1.4 U4.2.4

## Polygon pours and split planes (outlines as drawn)
GND on Top Layer "Top Layer-No Net" (solid, remove dead copper, pour order 33): -18.796,36.576 -39.878,15.494 -39.878,11.43 -39.878,-18.542 -38.862,-19.558 -19.558,-38.862 19.304,-38.862 19.558,-38.862 39.624,-18.796 39.37,-18.542 39.37,18.796 39.37,21.844 23.622,37.592
"POW IN" on Top Layer "Top Layer-No Net" (solid, remove dead copper, pour order 17): 29.882,-1.043 29.859,-1.565 32.363,-1.554 32.398,0.353 32.352,1.766 32.257,3.035 32.034,4.859 31.791,6.252 31.505,7.564 31.106,9.066 30.922,9.675 30.349,9.496 29.756,11.497 29.028,13.229 28.822,13.67 27.738,13.156 28.564,11.252 28.894,10.374 29.473,8.591 30.434,8.871 30.856,7.266 31.23,5.437 31.547,3.107 31.627,2.142 31.697,0.415 31.683,-1.037
B- on Top Layer "Top Layer-No Net" (solid, remove dead copper, pour order 29): -7.434,26.787 -7.798,28.146 -4.316,28.879 -1.038,29.174 1,29.175 1,27.905 -1,27.905 -2.927,27.847 -5.084,27.433
R- on Top Layer "Top Layer-No Net" (solid, remove dead copper, pour order 28): -5.626,23.434 -5.253,21.878 -3.551,22.421 -1.97,22.514 0.994,22.69 1,24.095 -1,24.095 -2.519,23.968 -4.185,23.734
G- on Top Layer "Top Layer-No Net" (solid, remove dead copper, pour order 27): -8.157,16.16 -7.58,15.335 -5.426,16.216 -3.409,16.757 -1.639,17.021 0,17.1 1.49,17.035 2.528,16.912 3.94,26.361 1.397,26.663 -1,26.635 -1,25.365 1,25.365 2.655,25.261 1.896,18.036 -0.953,18.175 -3.784,17.802 -6.075,17.156
3V3 on Top Layer "Top Layer-No Net" (solid, remove dead copper, pour order 26): -12.799,-11.935 -14.554,-13.572 -11.976,-15.893 -10.357,-13.744 -12.281,-12.186 -12.668,-11.813
3V3 on Top Layer "Top Layer-No Net" (solid, remove dead copper, pour order 25): -3.56,-20.189 -2.676,-20.325 -2.284,-17.35 -1.525,-17.433 0,-17.5 2.284,-17.35 4.529,-16.904 6.697,-16.168 8.75,-15.155 10.653,-13.884 12.374,-12.374 13.406,-11.249 16.547,-13.884 17.021,-13.298 21.197,-16.561 22.998,-14.093 24.074,-12.003 23.447,-11.69 22.219,-13.884 21.004,-15.828 13.577,-10.231 11.485,-12.534 9.751,-13.926 7.981,-15.01 6.506,-15.706 5.112,-16.213 3.679,-16.597 2.219,-16.855 0.742,-16.984 -1.482,-16.935 -2.952,-16.742
NetBT1.1_2 on Top Layer "Top Layer-No Net" (solid, remove dead copper, pour order 24): 11.86,-0.827 11.732,-2.223 11.064,-4.631 10.711,-5.474 9.595,-7.295 7.415,-9.581 8.365,-10.665 9.953,-9.12 11.406,-7.407 12.427,-5.275 13.251,-3.059 13.711,-1.562 15.102,-1.721 15.179,-0.796 15.195,0.398 15.163,1.06 11.767,0.823
VBAT on Top Layer "Top Layer-No Net" (solid, remove dead copper, pour order 23): 21.301,2.051 20.79,2.002 20.007,1.926 19.851,2.717 16.193,1.973 11.656,1.581 11.078,3.777 18.866,5.726 19.115,4.766 21.892,5.458 22.284,2.146
VLED on Top Layer "Top Layer-No Net" (solid, remove dead copper, pour order 22): -1.246,-21.593 -1.264,-30.082 1.779,-30.082 5.085,-29.705 8.808,-28.811 6.257,-20.465 4.306,-21.166 1.819,-21.593
NetD1.2_1 on Top Layer "Top Layer-No Net" (solid, remove dead copper, pour order 21): 8.189,-19.771 8.802,-21.249 10.845,-20.396 12.917,-19.151 9.898,-14.674 8.493,-15.643 6.812,-16.445
5V on Top Layer "Top Layer-No Net" (solid, remove dead copper, pour order 20): 22.386,-0.782 22.379,-0.977 23.029,-1.812 23.012,-2.013 27.915,-2.442 27.979,-0.977 26.284,-0.918 26.291,-0.688 24.392,-0.639 24.385,-0.852
VOUT on Top Layer "Top Layer-No Net" (solid, remove dead copper, pour order 19): 21.165,-3.163 23.344,-3.624 23.205,-4.301 24.483,-4.538 24.442,-4.751 24.4,-4.964 24.356,-5.177 24.262,-5.601 24.212,-5.813 24.16,-6.024 24.107,-6.234 27.689,-7.161 27.56,-7.643 27.276,-8.6 26.789,-10.016 24.927,-13.817 21.509,-18.698 17.75,-15.704 13.786,-18.973 10.345,-14.239 11.592,-13.229 14.225,-16.96 17.053,-14.057 17.494,-13.668 21.197,-16.561 22.889,-14.303 24.289,-11.326 24.57,-10.838 25.028,-9.859 24.749,-9.749 25.57,-7.332 20.379,-5.844
5V on Top Layer "Top Layer-No Net" (solid, remove dead copper, pour order 16): 18.818,11.588 20.313,10.574 25.368,13.206 26.203,11.461 26.811,9.957 27.457,8.003 27.908,6.251 28.197,4.782 28.662,4.412 28.776,3.597 29.76,3.709 29.768,3.721 29.544,5.209 29.289,6.493 29.171,7.003 30.83,7.367 31.078,7.442 30.628,8.925 29.473,8.591 29.349,9.269 28.325,8.931 26.807,12.786 25.801,14.302 21.752,12.119 20.339,12.958
GND on Bottom Layer "Top Layer-No Net" (solid, remove dead copper, pour order 35): -18.034,35.306 -37.084,16.256 -41.91,16.256 -41.91,-16.51 -38.354,-20.066 -18.796,-39.624 0.508,-39.624 17.018,-39.624 40.132,-16.51 36.83,-13.208 36.83,18.034 36.83,18.288 16.256,38.862

## Keep-outs
Keep-Out Layer:
  circle w0.2: c0,0 r35.012

## Other copper
Top Layer:
  region net 5V: 22.982,-0.906 23.029,-1.812 24.044,-1.893 24.103,-1.669 24.183,-0.906
  region net VOUT: 20.805,-1.731 20.3,-4.874 21.1,-5.066 21.37,-3.768 21.165,-3.163 21.283,-2.237 21.305,-1.731
  pour cut-out: -34.167,-1.492 -31.47,-1.374 -31.5,0 -31.38,2.745 -31.021,5.47 -30.427,8.153 -21.796,5.47 -16.22,14.863 -25.141,23.038 -27.587,20.043 -28.599,18.572 -30.108,16.009 -31.504,13.049 -32.426,10.224 -33.194,7.359 -33.709,4.438 -33.953,1.779
Bottom Layer:
  pour cut-out: -34.167,-1.492 -31.47,-1.374 -31.5,0 -31.38,2.745 -31.021,5.47 -30.427,8.153 -21.796,5.47 -16.22,14.863 -25.141,23.038 -27.587,20.043 -28.599,18.572 -30.108,16.009 -31.504,13.049 -32.426,10.224 -33.194,7.359 -33.709,4.438 -33.953,1.779

## Silkscreen, mask and mechanical layers (free items; w line width, h text height)
Top Overlay:
  lines w0.254: -21.997,-20.692 -21.984,-20.692 -21.805,-20.514 -19.988,-20.514 -19.817,-20.343 ; -21.073,-21.632 -20.822,-21.381 -19.104,-21.381 -18.911,-21.188
  text "Designed by Burning" at -5.627,13.255 h2.5
  text "06.04.2016" at -2.022,11.321 h1.5
  text "3V3" at -26.003,-19.329 h0.6 r40
  text "GND" at -25.19,-20.217 h0.6 r40
  text "DTR" at -19.387,-20.341 h0.6 r47
  text "RXD" at -24.302,-21.125 h0.6 r41
  text "RTS" at -18.435,-21.207 h0.6 r47
  text "RST" at -23.526,-22.131 h0.6 r41
  text "TEST" at -22.729,-23.23 h0.6 r42
  text "TXD" at -21.919,-24.131 h0.6 r42
Bottom Overlay:
  text "3V3" at -24.799,-18.266 h0.6 r36.38
  text "GND" at -23.984,-19.164 h0.6 r38.62
  text "RXD" at -23.213,-20.09 h0.6 r39.72
  text "DTR" at -22.361,-21.035 h0.6 r43.25
  text "RTS" at -21.096,-21.75 h0.6 r40.5
  text "TXD" at -20.559,-22.934 h0.6 r40.37
Mechanical 1:
  lines w0.2: 9.796,3.183 ccw(c0,0) 10.189,-1.511 ; 10.586,3.338 cw(c0,0) 10.992,-1.545
  lines w0.254: 9.796,3.183 10.586,3.338 ; 10.189,-1.511 10.992,-1.545
Mechanical 2:
  lines w0.254: -34.167,-1.492 -33.953,1.779 -33.709,4.438 -33.194,7.359 -32.426,10.224 -31.504,13.049 -30.108,16.009 -28.599,18.572 -27.587,20.043 -25.141,23.038 -16.22,14.863 -19.939,9.298 -28.549,13.312 -29.6,10.774 -30.427,8.153 -31.021,5.47 -31.38,2.745 -31.5,0 -31.47,-1.374 -34.167,-1.492
Mechanical 3:
  lines w0.2: -33.019,-2.309 ccw(c0,0) -29.999,-13.989 ; -28.331,-1.981 ccw(c0,0) -25.739,-12.002 ; -13,0 cw(c0,0) 13,0
  lines w0.254: -32.92,-2.302 -28.331,-1.981 ; -29.999,-13.989 -25.739,-12.002
Mechanical 7:
  circle w0.2: c0,0 r33.406

## Text inside footprints (layer, text, board x,y; h text height)
BT1.1: Top Overlay "+" at 12.594,4.786 h0.6 r275